# Altium PCB Panel.PcbDoc
Units mm, origin at the board's own origin, x right, y up, seen from the top; angles counter-clockwise.
Board outline 97 x 80 mm, 2 copper layers (Top Layer, Bottom Layer); 4 components, 0 nets, 8 pads, 0 vias.
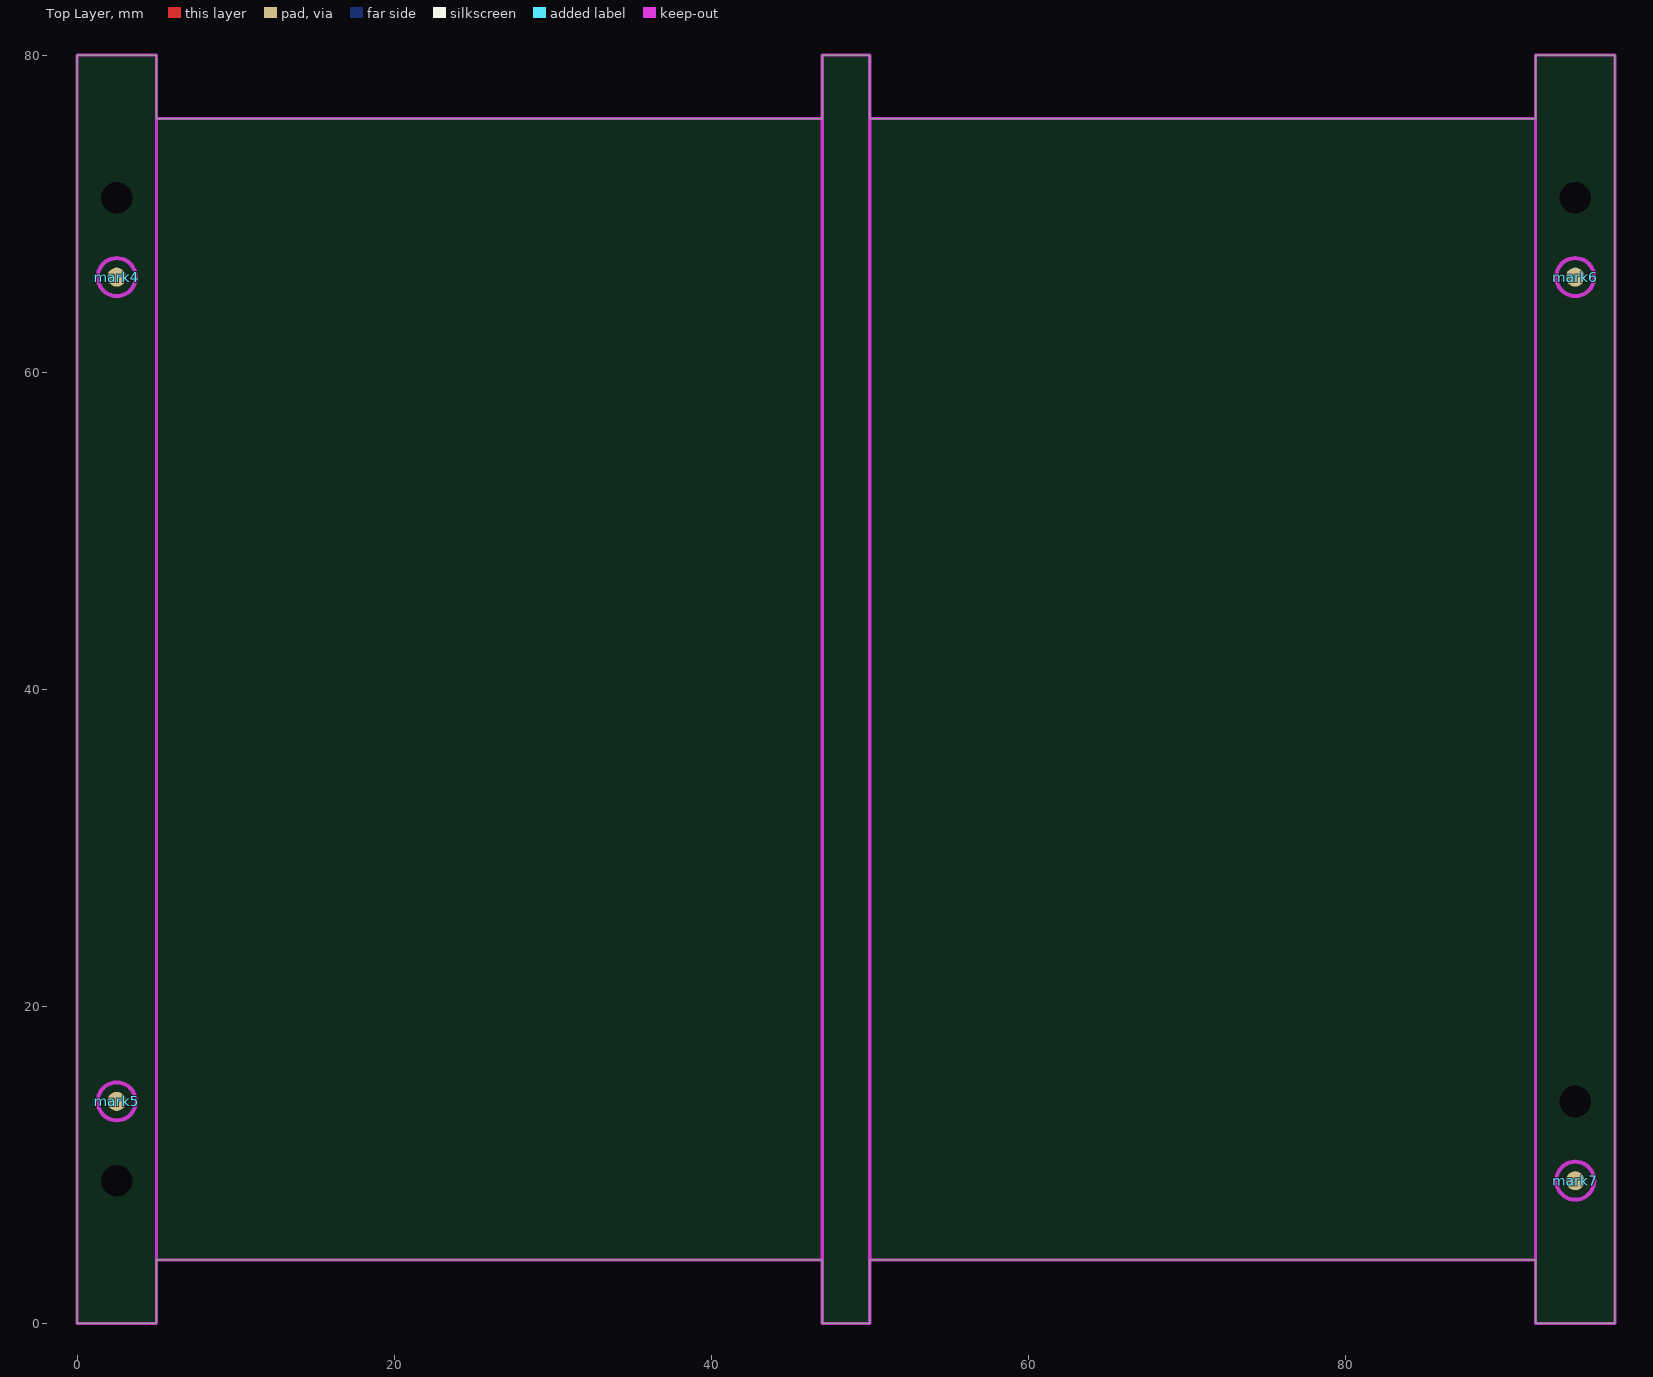
[diagram p0: Top Layer view]
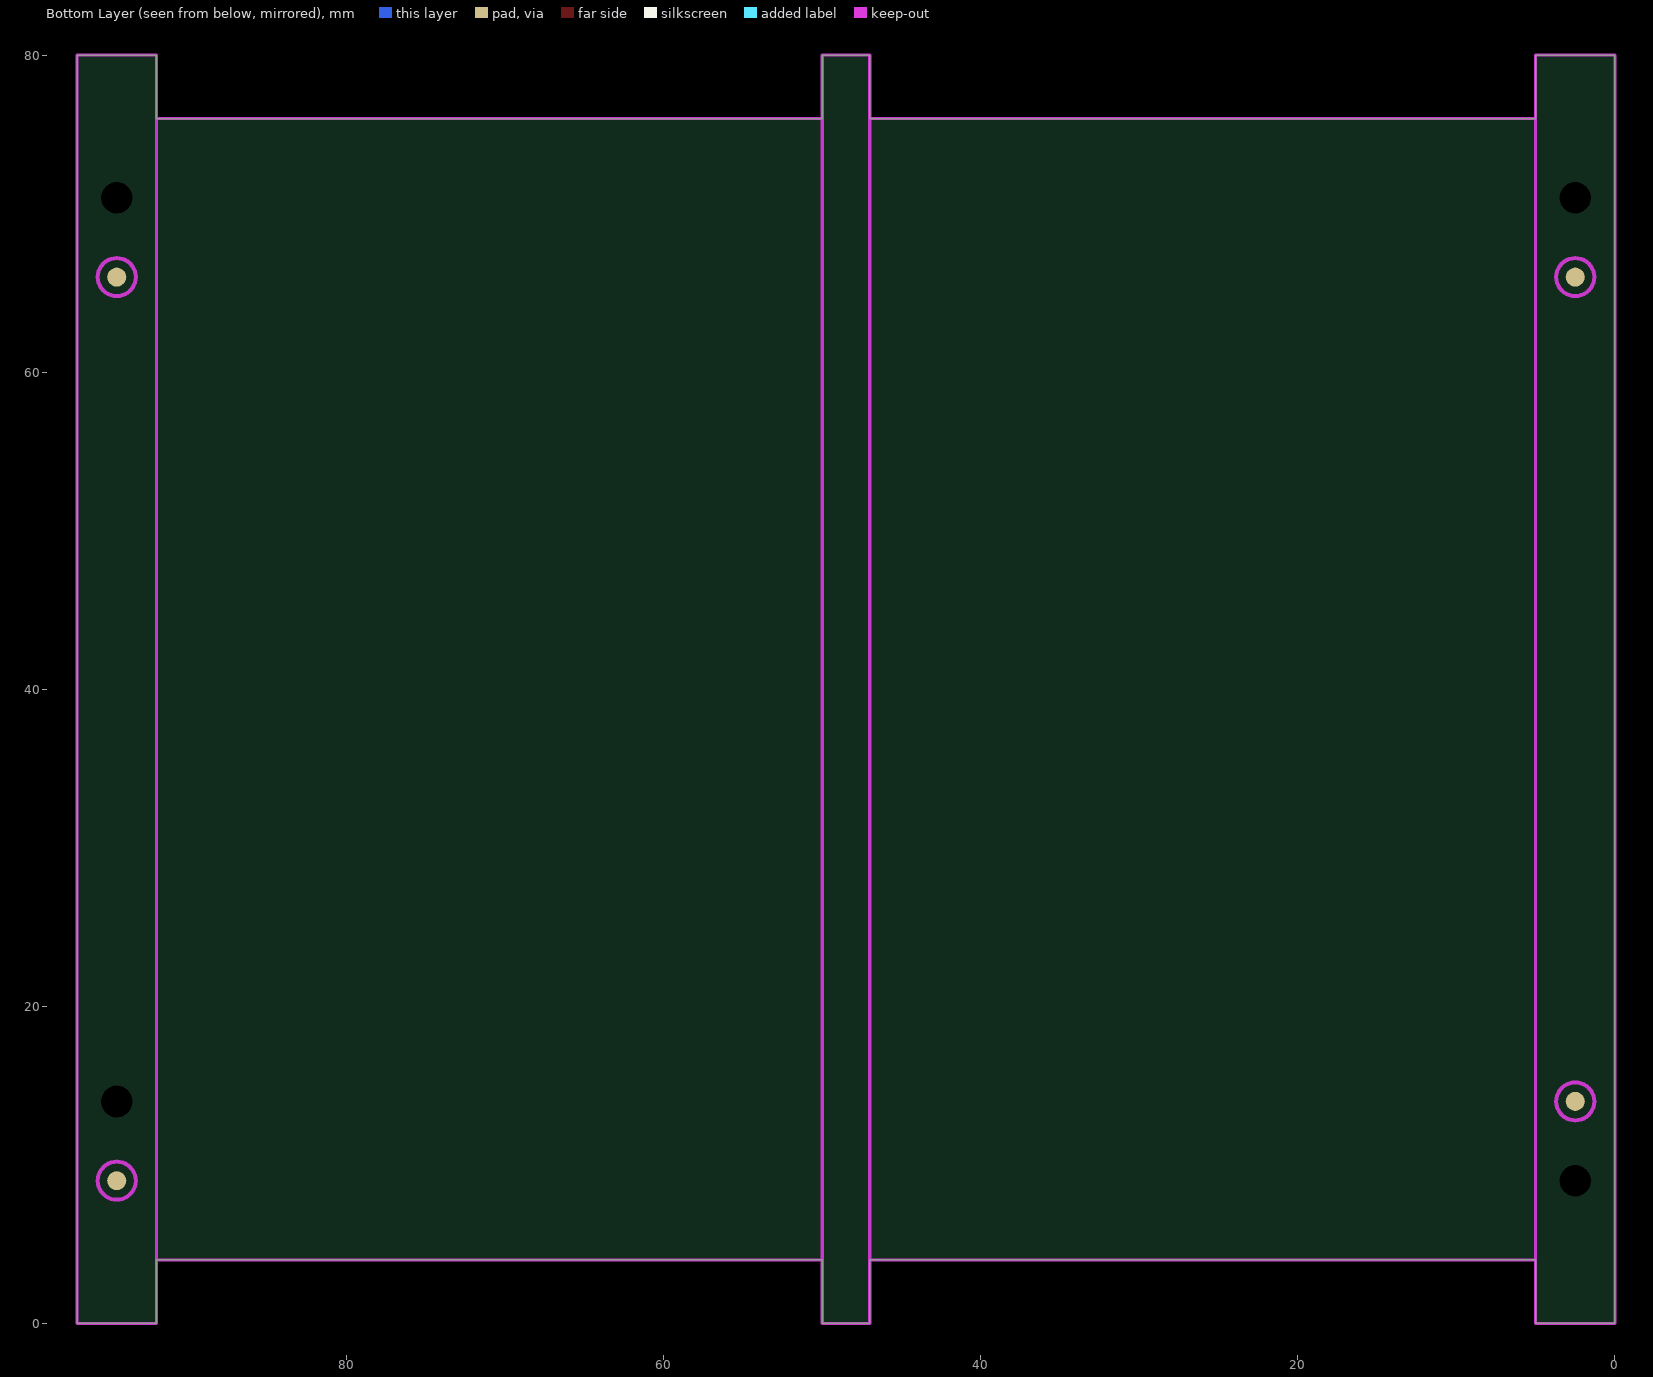
[diagram p1: Bottom Layer view, seen from below]

## Layer stack, top to bottom
Top Solder: solder mask 0.0102, Solder Resist, Dk 3.5
Top Layer: signal copper 0.0356
Dielectric 1: dielectric 0.32, FR-4, Dk 4.8
Bottom Layer: signal copper 0.0356
Bottom Solder: solder mask 0.0102, Solder Resist, Dk 3.5

## Board outline
5,0 5,4 47,4 47,0 50,0 50,4 92,4 92,0 97,0 97,80 92,80 92,76 50,76 50,80 47,80 47,76 5,76 5,80 0,80 0,0

## Design rules (kind name [scope] priority, off if disabled: settings)
Clearance [All] p1: gap=0.254 ignorepadtopadclearanceinfootprint=FALSE except(0: Arc-Hole Track-Hole SMDPad-Hole THPad-Hole Via-Hole Fill-Hole Poly-Hole Region-Hole Text-Hole)
PolygonConnect [All] p1: connectstyle=Relief reliefconductorwidth=0.254 reliefentries=4 polygonreliefangle="90 Angle" airgapwidth=0.254
RoutingVias [All] p1: holewidth=0.711 width=1.27 viastyle="Through Hole" minholewidth=0.711 minwidth=1.27 maxholewidth=0.711 maxwidth=1.27
SolderMaskExpansion [All] p1: expansion=0.102
Width [All] p1: maxlimit=0.254 minlimit=0.254 preferedwidth=0.254
30 further rules are at their usual default settings.

## Components (designator, comment, footprint, x,y, rotation, side; value= is the part's Value field where it differs from the comment)
mark4 "TP" MARK_2 2.5,66 r0 top (schematic designator mark2)
mark5 "TP" MARK_2 2.5,14 r0 top (schematic designator mark2)
mark6 "TP" MARK_2 94.5,66 r180 top (schematic designator mark2)
mark7 "TP" MARK_2 94.5,9 r180 top (schematic designator mark2)

## Footprints (in the part's own frame and the unit in brackets; to place one, negate y for a bottom-side part, rotate by r counter-clockwise, add the part's x,y. Pads: shape width x height; smd on the part's side, far side on the other; paste and mask are expansions set on the pad)
MARK_2 [mm]
  round 1.2 all layers, no hole mask+0.45: 1(0,0)
  Top Layer keep-out circle w0.254: c0,0 r1.2
  Bottom Layer keep-out circle w0.254: c0,0 r1.2

## Free pads (board coordinates)
  round 0 hole 2 unplated: 13(2.5,71) 13(2.5,9) 13(94.5,71) 13(94.5,14)

## Nets (pads, with @x,y where several pads share a name; then routed paths per layer and width w, separated by ;. In a path a pad name is that pad's centre, name@x,y a point inside that pad or via, vN(x,y) a via of type N, cw(c..) or ccw(c..) an arc to the next point about the centre after c; other vN are vias at no path point)
pads on no net: mark4.1 mark5.1 mark6.1 mark7.1

## Keep-outs
Keep-Out Layer:
  lines w0.2: 5,4 47,4 ; 5,76 47,76 ; 50,4 92,4 ; 50,76 92,76 ; 0,0 0,80 5,80 5,0 0,0 ; 0,4 0,4 ; 47,0 47,80 50,80 50,0 47,0 ; 92,0 97,0 97,80 92,80 92,0 ; 97,76 97,76

## Panel: embedded boards
"ESP12_PCB.PcbDoc" at 5,4, 1 rows x 2 columns, spacing 63.5 x 45, rotation 0